# EAGLE board GasMonitorV1 (EAGLE 8.0.1)

Size 160 x 100 mm. Coordinates in mm from the lower left corner, seen from the top.
Outline: 0,0 160,0 160,100 0,100 0,0
Copper layers (1*16): Top 0.035mm / dielectric 1.5mm / Bottom 0.035mm
Design rules "default": minimum track width 10mil, minimum drill 24mil, track to track 8mil, track to pad 8mil, pad to pad 8mil, via to via 8mil, smd to smd 8mil, copper to edge 40mil, drill to drill 8mil, minimum pad ring 10mil, minimum via ring 8mil, stop-mask expansion 4mil, vias tented up to drill 0mil, thermal gap 10mil
Net classes: 0 default: width 0.203 mm; 1 vcc: width 0.254 mm

## Footprints (pad centres in the part's own frame; a part is rotated, then mirrored left to right if it is on the bottom)
0603-CAP = smd 1.1 x 1: 1 -0.85,0; 2 0.85,0
EIA3216 = smd 1.4 x 1.6: A 1.4,0; C -1.4,0
0603-LED-ALT1 = smd 1 x 1: A 0,-0.877; C 0,0.877
1X06 = drill 1.016 pad 1.88: 1 0,0; 2 2.54,0; 3 5.08,0; 4 7.62,0; 5 10.16,0; 6 12.7,0
1X02 = drill 1.016 pad 1.88: 1 0,0; 2 2.54,0
RESONATOR-SMD-1:1 = smd 0.45 x 1.905: 1 -1.2,0; 2 0,0; 3 1.2,0
0603-RES = smd 1.1 x 1: 1 -0.85,0; 2 0.85,0
M1206 = smd 1.6 x 2: 1 -1.4,0; 2 1.4,0
TACTILE-SWITCH-SMD-ALT01 = smd 1.524 x 0.762: 1 -2.794,1.905; 2 2.794,1.905; 3 -2.794,-1.905; 4 2.794,-1.905
SJ_2S = smd 0.635 x 1.27: 1 -0.412,0; 2 0.412,0
TQFP32-08 = smd 1.27 x 0.559: 1 -4.293,2.8; 2 -4.293,2; 3 -4.293,1.2; 4 -4.293,0.4; 5 -4.293,-0.4; 6 -4.293,-1.2; 7 -4.293,-2; 8 -4.293,-2.8; 17 4.293,-2.8; 18 4.293,-2; 19 4.293,-1.2; 20 4.293,-0.4; 21 4.293,0.4; 22 4.293,1.2; 23 4.293,2; 24 4.293,2.8 | smd 0.559 x 1.27: 9 -2.8,-4.293; 10 -2,-4.293; 11 -1.2,-4.293; 12 -0.4,-4.293; 13 0.4,-4.293; 14 1.2,-4.293; 15 2,-4.293; 16 2.8,-4.293; 25 2.8,4.293; 26 2,4.293; 27 1.2,4.293; 28 0.4,4.293; 29 -0.4,4.293; 30 -1.2,4.293; 31 -2,4.293; 32 -2.8,4.293
SOT23-5 = smd 0.55 x 1.2: 1 -0.95,-1.3; 2 0,-1.3; 3 0.95,-1.3; 4 0.95,1.3; 5 -0.95,1.3
MICRO-SD-SOCKET-PP = smd 0.8 x 1.5: 1 -8.94,10.7; 2 -7.84,10.3; 3 -6.74,10.7; 4 -5.64,10.9; 5 -4.54,10.7; 6 -3.44,10.9; 7 -2.34,10.7; 8 -1.24,10.7 | smd 1.8 x 1.4: CD1 -7.75,0.4; CD2 -2.05,0.4 | smd 1.4 x 1.9: GND1 -13.6,14.55; GND2 -0.45,13.55
QFN16 = smd 0.7 x 0.35: 1 -1.725,0.975; 2 -1.725,0.325; 3 -1.725,-0.325; 4 -1.725,-0.975; 9 1.725,-0.975; 10 1.725,-0.325; 11 1.725,0.325; 12 1.725,0.975 | smd 0.35 x 0.7: 5 -0.975,-1.725; 6 -0.325,-1.725; 7 0.325,-1.725; 8 0.975,-1.725; 13 0.975,1.725; 14 0.325,1.725; 15 -0.325,1.725; 16 -0.975,1.725 | smd 1 x 1: TAB 0,0
SOT-23 = smd 1 x 1.4: 1 -0.95,-1.1; 2 0.95,-1.1; 3 0,1.1
SOT-23-5 = smd 1 x 0.55: 1 -1.35,0.95; 2 -1.35,0; 3 -1.35,-0.95; 4 1.35,-0.95; 5 1.35,0.95

## Placement (x,y rotation side)
C1  0.1uF  [0603-CAP]  -15.24,53.34 0 top  (outside the outline)
C2  0.1uF  [0603-CAP]  -19.05,53.34 0 top  (outside the outline)
C3  0.1uF  [0603-CAP]  -22.86,53.34 0 top  (outside the outline)
C4  0.1uF  [0603-CAP]  -26.67,53.34 0 top  (outside the outline)
C5  0.1uF  [0603-CAP]  -30.48,53.34 0 top  (outside the outline)
C6  0.1uF  [0603-CAP]  -34.29,53.34 0 top  (outside the outline)
C10  0.1uF  [0603-CAP]  -38.1,53.34 0 top  (outside the outline)
C13  10uF  [EIA3216]  -38.1,48.26 0 top  (outside the outline)
C19  10uF  [EIA3216]  -44.45,48.26 0 top  (outside the outline)
D3  Green  [0603-LED-ALT1]  -49.53,48.26 0 top  (outside the outline)
JP1  FTDI Basic  [1X06]  26.67,96.52 0 top
JP2  [1X02]  -49.53,36.83 0 top  (outside the outline)
JP3  [1X02]  -17.78,41.91 0 top  (outside the outline)
LED1  Red  [0603-LED-ALT1]  -53.34,48.26 0 top  (outside the outline)
Q1  8/16/20MHz  [RESONATOR-SMD-1:1]  -27.94,48.26 0 top  (outside the outline)
R1  [0603-RES]  -49.53,55.88 0 top  (outside the outline)
R2  10K  [0603-RES]  -41.91,53.34 0 top  (outside the outline)
R3  [0603-RES]  -53.34,55.88 0 top  (outside the outline)
R4  [M1206]  -26.67,41.91 0 top  (outside the outline)
R5  10K  [0603-RES]  -45.72,53.34 0 top  (outside the outline)
R6  330  [0603-RES]  -49.53,53.34 0 top  (outside the outline)
R7  10K  [0603-RES]  -53.34,53.34 0 top  (outside the outline)
R8  10K  [0603-RES]  -15.24,57.15 0 top  (outside the outline)
R9  10K  [0603-RES]  -19.05,57.15 0 top  (outside the outline)
R10  10K  [0603-RES]  -22.86,57.15 0 top  (outside the outline)
R11  10K  [0603-RES]  -26.67,57.15 0 top  (outside the outline)
R12  10K  [0603-RES]  -30.48,57.15 0 top  (outside the outline)
R13  10K  [0603-RES]  -34.29,57.15 0 top  (outside the outline)
R14  10K  [0603-RES]  -38.1,57.15 0 top  (outside the outline)
R15  10K  [0603-RES]  -41.91,57.15 0 top  (outside the outline)
S1  Reset  [TACTILE-SWITCH-SMD-ALT01]  69.85,78.74 0 top
SJ1  [SJ_2S]  -45.72,55.88 0 top  (outside the outline)
U1  ATMEGA328  [TQFP32-08]  82.55,30.48 0 top
U2  MIC5205  [SOT23-5]  -21.59,43.18 0 top  (outside the outline)
U3  USD-SOCKETSMD  [MICRO-SD-SOCKET-PP]  106.68,25.4 270 top
U$1  INA3221  [QFN16]  52.07,87.63 0 top
U$2  MOSFET_SOT23  [SOT-23]  -31.75,43.18 0 top  (outside the outline)
U$3  MOSFET_SOT23  [SOT-23]  -38.1,43.18 0 top  (outside the outline)
U$4  MOSFET_SOT23  [SOT-23]  -44.45,43.18 0 top  (outside the outline)
U$5  MOSFET_SOT23  [SOT-23]  -50.8,43.18 0 top  (outside the outline)
U$6  MOSFET_SOT23  [SOT-23]  -15.24,49.53 0 top  (outside the outline)
U$7  HALL_SENSE  [SOT-23]  -21.59,49.53 0 top  (outside the outline)
U$8  INVERTER_SOT23-5  [SOT-23-5]  -33.02,48.26 0 top  (outside the outline)

## Library data of the parts
C1-C6 C10 C13 C19 JP1-JP3 R1-R3 R5-R15 U1-U3 = SparkFun
D3 LED1 Q1 S1 = Testing
R4 = resistor
SJ1 = SparkFun-Passives
U$1 = ARVP 2016
U$2-U$8 = smd-footprints

## Nets
A0: U1.23
A1: U1.24
A2: U1.25
A3: U1.26
A4: JP2.1 R1.1 U1.27 U$1.7
A5: JP2.2 R3.1 U1.28 U$1.6
A6: JP3.1 U1.19
A7: JP3.2 U1.22
AREF: C1.2 U1.20
D2: U1.32
D3: U1.1
D4: U1.2
D5: U1.9
D6: U1.10
D7: U1.11
D8: U1.12
D9: U1.13
D10: U1.14 U3.2
DTR: C2.2 JP1.1
GND [vcc]: C1.1 C3.1 C4.1 C5.2 C6.1 C10.2 C13.C C19.C D3.C JP1.5 JP1.6 Q1.2 R5.2 R7.2 R8.2 R9.2 R11.1 R12.1 R15.2 S1.1 S1.2 U1.3 U1.5 U1.21 U2.2 U3.6 U3.CD1 U3.CD2 U3.GND1 U3.GND2 U$1.3 U$1.5 U$6.2 U$7.3 U$8.3
HALL_SENSE_OP: C4.2 R5.1 U$2.1 U$3.1 U$4.1 U$5.1 U$8.4
MISO: U1.16 U3.7
MOSI: U1.15 U3.3
N$1: Q1.3 U1.8
N$2: Q1.1 U1.7
N$3: LED1.A SJ1.1 U2.5
N$4: LED1.C R11.2
N$5: U$4.3
N$6: R15.1
N$7: D3.A R6.2
N$8: U$1.10
N$9: U$1.9
N$10: U$1.8
N$11: R7.1 U$2.2
N$12: U$2.3
N$13: C5.1 R12.2 R13.1 U$6.1
N$14: U$3.3
N$15: R13.2 U$7.2
N$16: C6.2 U$7.1
N$17: R10.2 R14.2 U$6.3
N$18: R8.1 U$3.2
N$19: R9.1 U$5.2
N$20: R10.1 U$8.2
N$21: U$5.3
RAW [vcc]: C19.A R4.2 U2.1 U2.3
RESET: C2.1 R2.1 S1.3 S1.4 U1.29
RXI: JP1.3 U1.30
SCK: R6.1 U1.17 U3.5
TXO: JP1.2 U1.31
V_BATT [vcc]: R4.1
VCC: C3.2 C10.1 C13.A JP1.4 R1.2 R2.2 R3.2 R14.1 SJ1.2 U1.4 U1.6 U1.18 U3.4 U$1.4 U$8.5

## Tracks (layer width: path | path; a pad name or v marks a point on that pad's centre or on a via)
A4  (3 unrouted)
A5  (3 unrouted)
A6  (1 unrouted)
A7  (1 unrouted)
AREF  (1 unrouted)
D10  (1 unrouted)
DTR  (1 unrouted)
GND  (34 unrouted)
HALL_SENSE_OP  (6 unrouted)
MISO  (1 unrouted)
MOSI  (1 unrouted)
N$1  (1 unrouted)
N$2  (1 unrouted)
N$3  (2 unrouted)
N$4  (1 unrouted)
N$7  (1 unrouted)
N$11  (1 unrouted)
N$13  (3 unrouted)
N$15  (1 unrouted)
N$16  (1 unrouted)
N$17  (2 unrouted)
N$18  (1 unrouted)
N$19  (1 unrouted)
N$20  (1 unrouted)
RAW  (3 unrouted)
RESET  (4 unrouted)
RXI  (1 unrouted)
SCK  (2 unrouted)
TXO  (1 unrouted)
VCC  (14 unrouted)